# EAGLE board Rocekt_test_stand_input_2.0 (EAGLE 9.5.2)
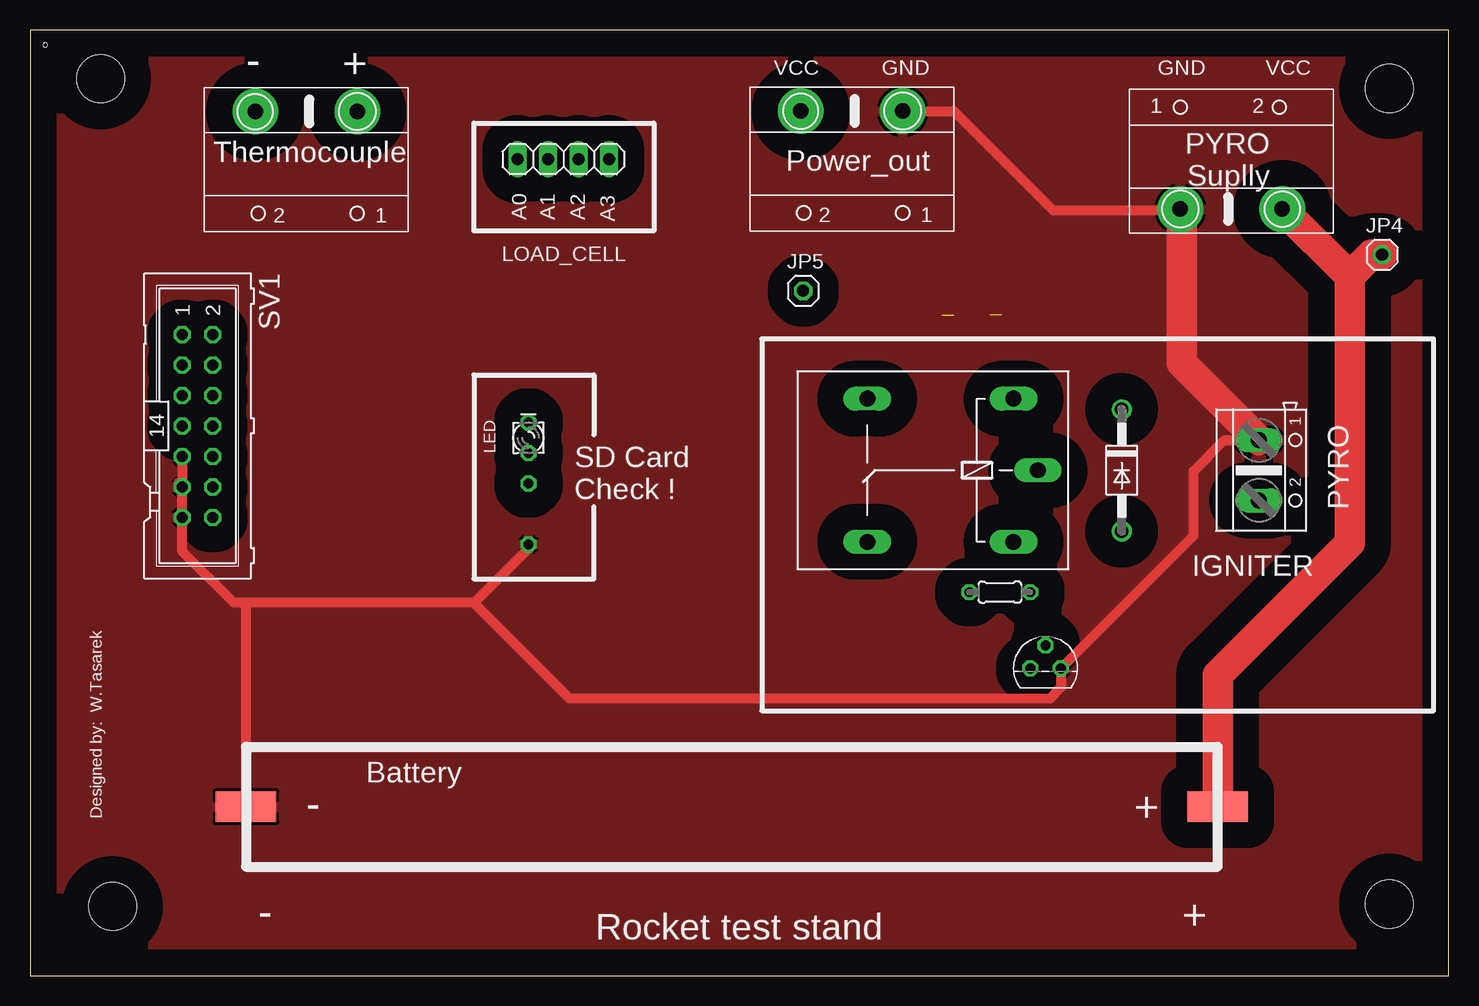
[diagram p0: board, top side]
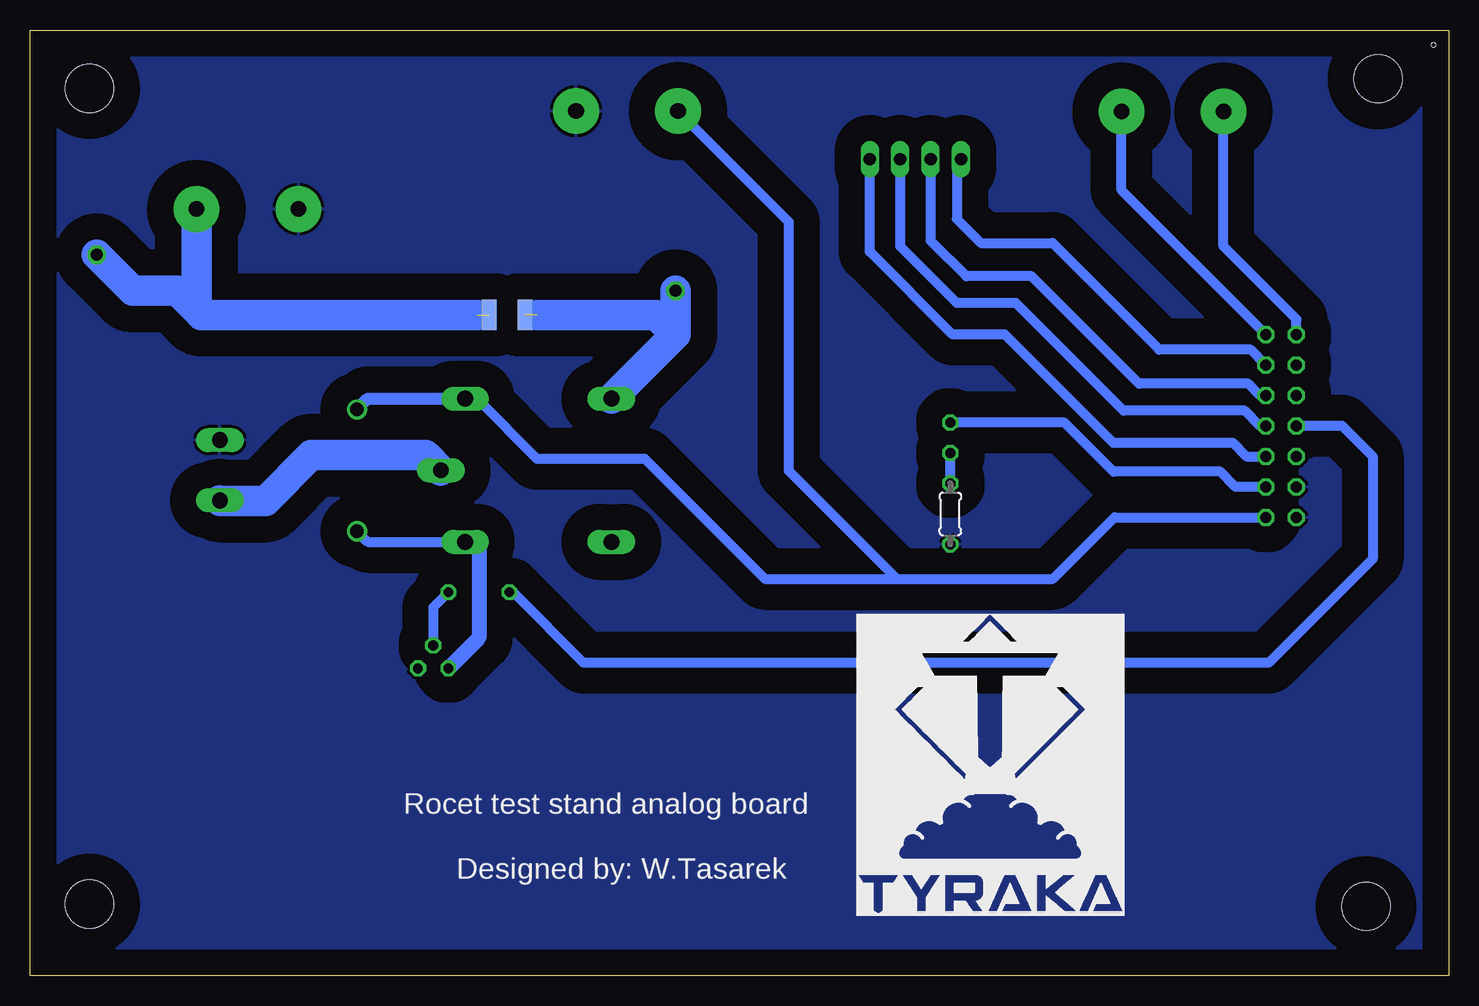
[diagram p1: board, bottom side, seen from below]

Size 118.27 x 78.84 mm. Coordinates in mm from the lower left corner, seen from the top.
Outline: 0,0 118.27,0 118.27,78.84 0,78.84 0,0
Copper layers (1*16): Top 0.035mm / dielectric 1.5mm / Bottom 0.035mm
Design rules "default": minimum track width 6mil, minimum drill 0.35mm, track to track 6mil, track to pad 6mil, pad to pad 6mil, via to via 6mil, smd to smd 6mil, copper to edge 40mil, drill to drill 6mil, minimum pad ring 10mil, minimum via ring 8mil, stop-mask expansion 4mil, vias tented up to drill 0mil, thermal gap 10mil
Holes 0.35 mm at 1.27,77.58
Holes 4 mm at 113.31,73.97 113.31,5.97 6.89,5.77 5.89,74.77

## Footprints (pad centres in the part's own frame; a part is rotated, then mirrored left to right if it is on the bottom)
SMD2,54-5,08 = smd 2.54 x 5.08: 1 0,0
DO41-10 = drill 1.118: A 5.08,0; C -5.08,0
1X01 = drill 1.016 octagon: 1 0,0
G5LE = drill 1.321 long: 1 -7.493,-5.969; 2 -7.493,5.969; O 4.699,5.969; P -9.525,0; S 4.699,-5.969
LED_LD260 = drill 0.813 octagon: A -1.27,0; K 1.27,0
1X04 = drill 1.016 long: 1 -3.81,0; 2 -1.27,0; 3 1.27,0; 4 3.81,0
SMD1,27-2,54 = smd 1.27 x 2.54: 1 0,0
ZLACZESRUBOWE8.5MM = drill 1.3 pad 3.81: P$1 4.25,2; P$2 12.75,2
AK500/2 = drill 1.321 long: 1 -2.515,0; 2 2.515,0
0204/5 = drill 0.813 octagon: 1 -2.54,0; 2 2.54,0
ML14 = drill 0.914 octagon: 1 -7.62,-1.27; 2 -7.62,1.27; 3 -5.08,-1.27; 4 -5.08,1.27; 5 -2.54,-1.27; 6 -2.54,1.27; 7 0,-1.27; 8 0,1.27; 9 2.54,-1.27; 10 2.54,1.27; 11 5.08,-1.27; 12 5.08,1.27; 13 7.62,-1.27; 14 7.62,1.27
TO92 = drill 0.813 octagon: 1 1.27,0; 2 0,1.905; 3 -1.27,0

## Placement (x,y rotation side)
+  [SMD2,54-5,08]  99,14.08 90 top
-  [SMD2,54-5,08]  18,14.08 90 top
D1  [DO41-10]  91.01,42.13 270 top
JP4  [1X01]  112.71,60.1 0 top
JP5  [1X01]  64.45,57.1 0 top
K1  [G5LE]  74.5,42.13 180 top
LED  [LED_LD260]  41.55,44.84 90 top
LOAD_CELL  [1X04]  44.46,68.08 0 top
PAD3  [SMD1,27-2,54]  80,55.08 0 bottom
PAD4  [SMD1,27-2,54]  77,55.08 180 bottom
POWER_SUPPLY  ARK_8.5MM  [ZLACZESRUBOWE8.5MM]  91.64,61.91 0 top
POWER_SUPPLY1  ARK_8.5MM  [ZLACZESRUBOWE8.5MM]  77,74.08 180 top
PYRO  [AK500/2]  102.44,42.13 270 top
R2  10k  [0204/5]  80.85,31.97 180 top
R4  1k  [0204/5]  41.55,38.49 270 bottom
SV1  [ML14]  13.97,45.83 270 top
T1  BC547  [TO92]  84.66,25.62 0 top
U$1  ARK_8.5MM  [ZLACZESRUBOWE8.5MM]  31.53,74.04 180 top

## Library data of the parts
+ - PAD3 PAD4 = wirepad
D1 = diode
JP4 JP5 LOAD_CELL = pinhead
K1 = relay; OC_FARNELL: unknown; OC_NEWARK: unknown
LED = eagle-ltspice; SPICEMODEL: NONE; SPICEPREFIX: D; SPICETYPE: diode
POWER_SUPPLY POWER_SUPPLY1 U$1 = 111_ark_8.5mm
PYRO = con-ptr500; OC_FARNELL: unknown; OC_NEWARK: unknown
R2 R4 = rcl; SPICEPREFIX: R
SV1 = con-harting-ml; OC_FARNELL: unknown; OC_NEWARK: unknown
T1 = transistor

## Nets
+5V/2: D1.C K1.1 POWER_SUPPLY1.P$2 SV1.14
-: SV1.1 U$1.P$2
A0: LOAD_CELL.1 SV1.4
A1: LOAD_CELL.2 SV1.6
A2: LOAD_CELL.3 SV1.8
A3: LOAD_CELL.4 SV1.10
GND: -.1 POWER_SUPPLY1.P$1 POWER_SUPPLY.P$1 PYRO.1 R4.2 SV1.9 SV1.11 SV1.13 T1.1
IGNITE: R2.2 SV1.7
LED: LED.K SV1.12
N$1: D1.A K1.2 T1.3
N$2: R2.1 T1.2
N$3: K1.P PYRO.2
N$5: SV1.2 U$1.P$1
N$6: LED.A R4.1
N$7: JP5.1 K1.S PAD4.1
VCC: +.1 JP4.1 PAD3.1 POWER_SUPPLY.P$2

## Tracks (layer width: path | path; a pad name or v marks a point on that pad's centre or on a via)
+5V/2
  Bottom 0.813: K1.1 81.02,48.1 76,43.08 67,43.08 57,33.08 46,33.08 | 46,33.08 33,33.08 27.87,38.21 SV1.14 | 46,33.08 55,42.08 55,62.83 POWER_SUPPLY1.P$2
  Bottom 1.016: D1.C 90.12,48.1 K1.1
-
  Bottom 0.813: SV1.1 12.7,54.72 18.78,60.8 U$1.P$2
A0
  Bottom 0.813: SV1.4 16.51,52.18 24.13,52.18 33.02,61.07 38.99,61.07 41,63.08 41,67.73 LOAD_CELL.1
A1
  Bottom 0.813: SV1.6 15.73,48.37 16.72,49.36 25.83,49.36 34.77,58.3 40.23,58.3 43.19,61.27 LOAD_CELL.2
A2
  Bottom 0.813: SV1.8 15.73,45.83 17,47.1 27.11,47.1 36.09,56.08 41,56.08 45.73,60.81 LOAD_CELL.3
A3
  Bottom 0.813: SV1.10 16.86,43.29 18,44.43 27.98,44.43 37,53.45 41.37,53.45 48.27,60.35 LOAD_CELL.4
GND
  Top 0.813: SV1.9 SV1.11 | SV1.11 SV1.13 12.7,35.38 17,31.08 18,31.08 | SV1.11 12.37,41.08 | PYRO.1 99.56,44.65 97,42.08 97,36.69 T1.1 85.93,24.01 85,23.08 45,23.08 37,31.08 | R4.2 41.55,35.63 37,31.08 | 37,31.08 18,31.08 | -.1 18,31.08 | POWER_SUPPLY1.P$1 77,72.08 85.28,63.8 96,63.8
  Top 2.54: POWER_SUPPLY.P$1 96,63.8 96,51.09 PYRO.1
  pour Top (isolate 2.184): 0,79.08 119,79.08 119,0.08 0,0.08
  pour Bottom (isolate 2.184): 0,79.08 0,0.08 118,0.08 118,79.08
IGNITE
  Bottom 0.203: R2.2 78,31.97
  Bottom 0.813: 78,31.97 72.11,26.08 15,26.08 6.35,34.73 6.35,43.29 8.89,45.83 SV1.7
LED
  Bottom 0.813: SV1.12 17.78,40.75 19.05,42.02 27.94,42.02 32.03,46.11 LED.K
N$1
  Bottom 0.305: 82.12,36.16 81.99,36.03
  Bottom 0.813: K1.2 90.12,36.16 D1.A
  Bottom 1.27: T1.3 80.85,28.16 80.85,35.78 81.04,35.97 81.93,35.97 81.99,36.03 K1.2
N$2
  Bottom 0.305: 83.64,31.72 R2.1
  Bottom 0.813: 83.64,31.72 84.66,30.7 T1.2
N$3
  Bottom 2.54: K1.P 85.3,43.4 94.82,43.4 98.63,39.59 102.42,39.59 PYRO.2
N$5
  Bottom 0.813: SV1.2 27.28,65.49 U$1.P$1
N$6
  Bottom 0.305: R4.1 41.55,41.08
  Bottom 0.813: 41.55,41.08 LED.A
N$7  (1 unrouted)
  Bottom 2.54: JP5.1 64.45,53.45 | K1.S 64.45,53.45 | 64.45,53.45 66.08,55.08 76,55.08
VCC  (1 unrouted)
  Top 2.54: +.1 99,25.08 110,36.08 110,58.3 | 110,58.3 POWER_SUPPLY.P$2 | JP4.1 111.8,60.1 110,58.3
  Bottom 2.54: 81,55.08 104,55.08 104.39,55.47 | 104.39,55.47 POWER_SUPPLY.P$2 | 104.39,55.47 106.02,57.1 109.71,57.1 JP4.1

## Text on the board
tPlace: - | + | VCC | GND | GND | VCC | PYRO / Suplly | Thermocouple | Power_out | A0 | A1 | A2 | A3 | SD Card / Check ! | IGNITER | Battery | Designed by: W.Tasarek | - | + | - | + | Rocket test stand
bPlace: Rocet test stand analog board | Designed by: W.Tasarek | C:/Users/Wiciu/Desktop/tyraka1_mono.bmp